# Altium PCB LV2.PcbDoc
Units mm, origin at the board's own origin, x right, y up, seen from the top; angles counter-clockwise.
Board outline 152.4 x 132.97 mm, 2 copper layers (Top Layer, Bottom Layer); 30 components, 23 nets, 91 pads, 8 vias.
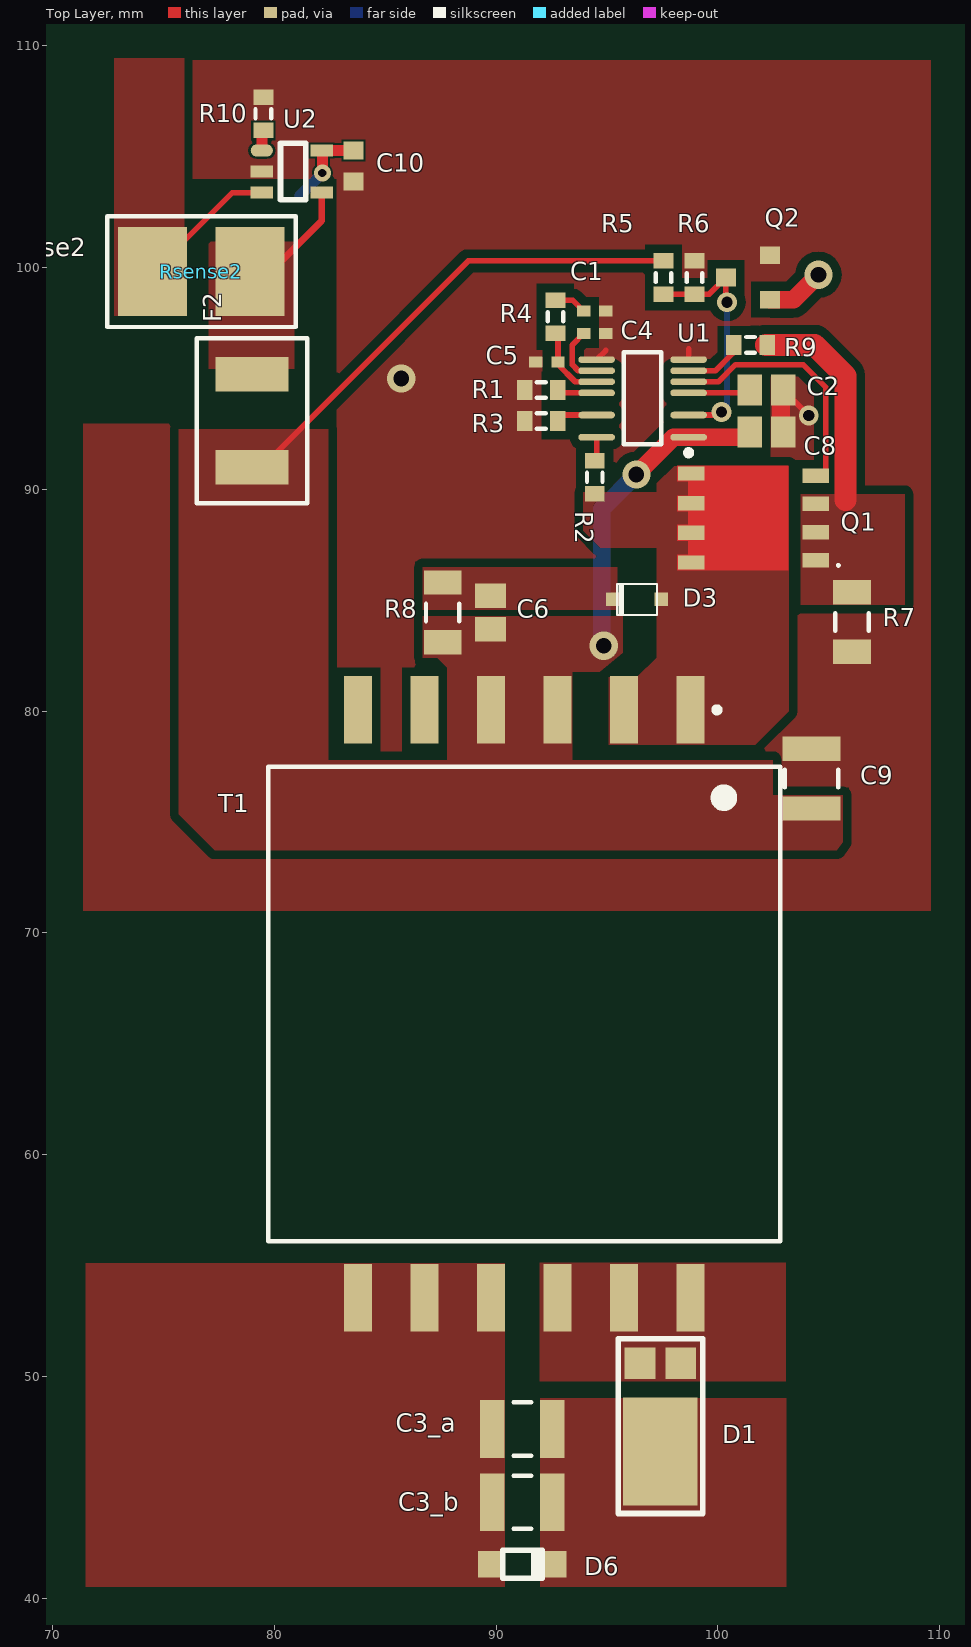
[diagram p0: Top Layer view]
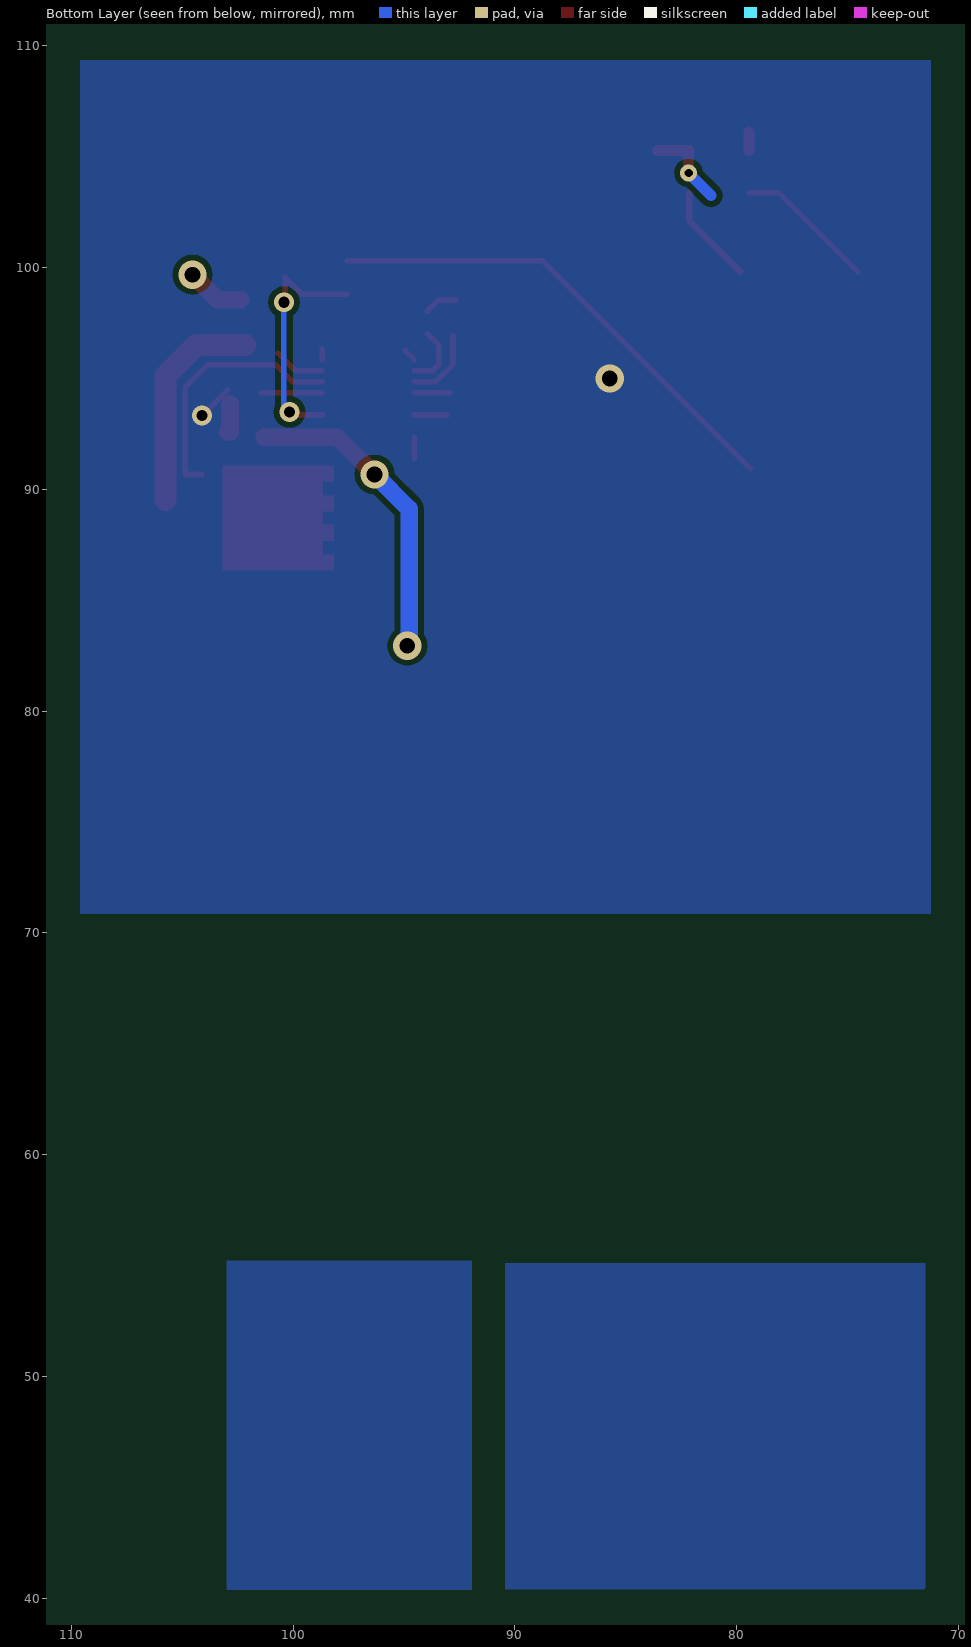
[diagram p1: Bottom Layer view, seen from below]

## Layer stack, top to bottom
Top Solder: solder mask 0.0102, Solder Resist, Dk 3.5
Top Layer: signal copper 0.0356
Dielectric 1: dielectric 0.32, FR-4, Dk 4.8
Bottom Layer: signal copper 0.0356
Bottom Solder: solder mask 0.0102, Solder Resist, Dk 3.5

## Board outline
25.4,25.4 177.8,25.4 177.8,158.369 25.4,158.369

## Design rules (kind name [scope] priority, off if disabled: settings)
Clearance [InNamedPolygon('GNDtop')] p1: gap=0.4
Clearance Clearance_2 [InNamedPolygon('GNDbottom')] p2: gap=0.256
Clearance Clearance_1 [All] p3: gap=0.1
PolygonConnect [All] p1: connectstyle=Direct reliefconductorwidth=0.254 reliefentries=4 polygonreliefangle="90 Angle" airgapwidth=0.254
RoutingVias [All] p1: holewidth=0.711 width=1.27 viastyle="Through Hole" minholewidth=0.711 minwidth=1.27 maxholewidth=0.711 maxwidth=1.27
SolderMaskExpansion [All] p1: expansion=0.102
Width [All] p1: maxlimit=1 minlimit=0.254 preferedwidth=0.254
30 further rules are at their usual default settings.

## Components (designator, comment, footprint, x,y, rotation, side; value= is the part's Value field where it differs from the comment)
C1 "Cap Semi" 0402 94.449,98.038 r180 top
C2 "Cap Semi" C0805 102.196,94.482 r180 top
C3_a "Cap Semi" C1210 91.186,47.625 r0 top
C3_b "Cap Semi" C1210 91.186,44.323 r0 top
C4 "Cap Semi" 0402 94.449,97.022 r180 top
C5 "Cap Semi" 0402 92.29,95.752 r0 top
C6 "Cap Semi" C0805 89.75,84.449 r270 top
C8 "Cap Semi" C0805 102.196,92.577 r180 top
C9 "Cap Semi" C1210 104.228,76.956 r270 top
C10 "Cap Semi" 1608[0603] 83.579,104.585 r90 top
D1 "PDS760-13" PDS1040L 97.409,46.609 r180 top
D3 "BAV20WS" SOD-323 96.353,85.038 r0 top
D6 "BZT52H-B5V6" SOD123F 91.186,41.529 r180 top
F2 "MF-MSMF075-2" MF-MSMF1 78.994,93.091 r270 top
Q1 "BSC320N20NS3 G" INF-PG-TDSON-8-1_V 101.593,88.708 r90 top
Q2 "BSS131" SOT-23_2 101.362,99.552 r0 top
R1 "Res3" J1-0603 92.036,94.482 r0 top
R2 "Res3" J1-0603 94.449,90.545 r270 top
R3 "Res3" J1-0603 92.036,93.085 r180 top
R4 "Res3" J1-0603 92.671,97.784 r270 top
R5 "Res3" J1-0603 97.552,99.552 r90 top
R6 "Res3" J1-0603 98.949,99.552 r270 top
R7 "Res3" C1206 106.053,84.018 r90 top
R8 "Res3" C1206 87.591,84.449 r90 top
R9 "Res3" J1-0603 101.473,96.52 r180 top
R10 "Res3" J1-0603 79.502,106.934 r270 top
Rsense2 "Rsense" R6432 76.708,99.822 r0 top
T1 "750311597" EFD20 91.274,66.796 r270 top
U1 "LT3748IMS#PBF" LT-MS-16-4PR_N 96.608,94.101 r180 top
U2 "INA138" SOT-23 80.785,104.331 r270 top

## Footprints (in the part's own frame and the unit in brackets; to place one, negate y for a bottom-side part, rotate by r counter-clockwise, add the part's x,y. Pads: shape width x height; smd on the part's side, far side on the other; paste and mask are expansions set on the pad)
0402 [mm] "Chip Capacitor, Body 1.0x0.5mm, IPC High Density"
  rect 0.6x0.5 smd: 1(-0.5,0) 2(0.5,0)
  body extent -0.55,-0.3 0.55,0.3, height 1.3
1608[0603] [mm] "Chip Capacitor, Body 1.6x0.8mm, IPC High Density"
  rect 0.8x0.9 smd: 1(-0.7,0) 2(0.7,0)
  body extent -0.87,-0.48 0.87,0.48, height 1.3
C0805 [mm] "Chip Capacitor, Body 2.0x1.3mm, IPC High Density"
  rect 1.1x1.4 smd: 1(-0.75,0) 2(0.75,0)
  body extent -1.1,-0.72 1.1,0.72, height 1.4
C1206 [mm] "Chip Capacitor, Body 3.2x1.6mm, IPC High Density"
  rect 1.1x1.7 smd: 1(-1.35,0) 2(1.35,0)
  silkscreen extent -0.4,-0.75 0.4,0.75, body extent -1.7,-0.9 1.7,0.9, height 1.3
C1210 [mm] "Chip Capacitor, Body 3.2x2.5mm, IPC High Density"
  rect 1.1x2.6 smd: 1(-1.35,0) 2(1.35,0)
  silkscreen extent -0.4,-1.2 0.4,1.2, body extent -1.7,-1.35 1.7,1.35, height 1.3
EFD20 [mm] "SMD, 10-Leads, Body 22.0x20.0mm (max), Pitch 3.75mm, IPC Medium Density"
  rect 3.05x1.27 smd: 1(-13.26,7.5) 2(-13.26,4.5) 3(-13.26,1.5) 4(-13.26,-1.5) 5(-13.26,-4.5) 6(-13.26,-7.5) 7(13.26,-7.5) 8(13.26,-4.5) 9(13.26,-1.5) 10(13.26,1.5) 11(13.26,4.5) 12(13.26,7.5)
  silkscreen extent -13.38,-11.55 10.7,11.55, body extent -14.54,-10 14.54,10, height 11.43
INF-PG-TDSON-8-1_V [mm] "TDSON, 8-Leads, Body 6.15x5.15mm, Pitch 1.27mm"
  rect 0.65x1.2 smd: 1(-1.905,-2.825) 2(-0.635,-2.825) 3(0.635,-2.825) 4(1.905,-2.825) 5(2.007,2.794) 6(0.66,2.794) 7(-0.66,2.794) 8(-2.007,2.794)
  Top Layer region: -2.35,2.925 -2.35,-1.575 2.35,-1.575 2.35,2.925
  Top Layer region: -2.35,2.925 -1.65,2.925 -1.65,3.425 -2.35,3.425
  Top Layer region: 1.65,2.925 2.35,2.925 2.35,3.425 1.65,3.425
  Top Layer region: -1.015,2.925 -0.315,2.925 -0.315,3.425 -1.015,3.425
  Top Layer region: 0.315,2.925 1.015,2.925 1.015,3.425 0.315,3.425
  silkscreen extent -2.23,-3.94 -2.03,-3.74, body extent -2.58,-3.08 2.58,3.08, height 1
J1-0603 [mm] "Chip Resistor, Body 1.6x0.8mm, IPC High Density"
  rect 0.7x0.9 smd: 1(-0.75,0) 2(0.75,0)
  silkscreen extent -0.2,-0.35 0.2,0.35, body extent -0.85,-0.48 0.85,0.48, height 0.9
LT-MS-16-4PR_N [mm] "SOP, 12-Leads, Body 4.1x3.1mm, Pitch 0.5mm, IPC Medium Density"
  oval 1.65x0.3 smd: 1(-2.075,1.75) 3(-2.075,0.75) 5(-2.075,-0.25) 6(-2.075,-0.75) 7(-2.075,-1.25) 8(-2.075,-1.75) 9(2.075,-1.75) 10(2.075,-1.25) 11(2.075,-0.75) 12(2.075,-0.25) 14(2.075,0.75) 16(2.075,1.75)
  silkscreen extent -2.2,-2.08 0.85,2.57, body extent -1.55,-2.05 1.55,2.05, height 1.1
MF-MSMF1 [mm]
  rect 1.55x3.3 smd: 1(-2.1,0) 2(2.1,0)
  silkscreen extent -3.73,-2.5 3.73,2.5
PDS1040L [mm]
  rect 1.39x1.4 smd: 1(-0.92,-3.982) 1(0.92,-3.982)
  rect 3.36x4.86 smd: 2(0,0)
  silkscreen extent -1.91,-5.08 1.91,2.79, body extent -1.52,-4.06 1.52,2.29, height 1
R6432 [mm]
  rect 3.1x4 smd: 1(-2.2,0) 2(2.2,0)
  silkscreen extent -4.25,-2.5 4.25,2.5
SOD123F [mm]
  rect 1.2x1.2 smd: 1(-1.4,0) 2(1.4,0)
  silkscreen extent -1.02,-0.64 0.89,0.64
SOD-323 [mm]
  rect 0.6x0.6 smd: 1(-1.1,0) 2(1.1,0)
  silkscreen extent -0.9,-0.7 0.9,0.7
SOT-23 [mm]
  oval 0.55x1 smd: 1(-0.95,-1.35)
  rect 0.55x1 smd: 2(0,-1.35) 3(0.95,-1.35) 4(0.95,1.35) 5(-0.95,1.35)
  silkscreen extent -1.27,-0.51 1.27,0.63
SOT-23_2 [mm]
  rect 0.9x0.8 smd: 1(1,-1) 2(1,1) 3(-1,0)
  body extent -0.89,-1.02 1.02,1.14, height 0.5

## Part data
C1 C2 C3_a C3_b C4 C5 C6 C8 C9 C10: "Capacitor (Semiconductor SIM Model)"
D1: library part PDS1040L, "Schottky Diode"
D3: "Power Diode"
D6: "Zener Diode"
F2: library part "Fuse 1", "Fuse"
Q1: "N-Channel OptiMOS 3 Power-Transistor, 200 V VDS, 36 A ID, -55 to 150 degC, PG-TDSON-8-1, Reel, Green"
Q2: "N-Channel MOSFET"
R1 R2 R3 R4 R5 R6 R7 R8 R9 R10: "Resistor"
Rsense2: "CRF2512-FV-R001ELF"
T1: "Flyback Transformer suitable or LT3573/ LT3574/ LT3575/ LT3748 WE-FB, Ui=20-48V"
U1: "Isolated Flyback Controller, 16-pin SOP (MS-16), -40 to 125 degC, Pb-Free"

## Via types
v1: diameter 1.27, hole 0.711, Top Layer to Bottom Layer, 4 vias
v2: diameter 0.9, hole 0.5, Top Layer to Bottom Layer, 3 vias
v3: diameter 0.762, hole 0.381, Top Layer to Bottom Layer, 1 vias

## Nets (pads, with @x,y where several pads share a name; then routed paths per layer and width w, separated by ;. In a path a pad name is that pad's centre, name@x,y a point inside that pad or via, vN(x,y) a via of type N, cw(c..) or ccw(c..) an arc to the next point about the centre after c; other vN are vias at no path point)
48V: Rsense2.1 U2.3 | length 6.4
  Top Layer w0.254: Rsense2.1@74.549,99.822 78.108,103.381 U2.3
+5V: C10.2 U2.5 | length 3.9
  Top Layer w0.5: U2.5 C10.2@83.575,105.281 ; v3(82.169,104.267) U2.5@82.169,105.247
  Bottom Layer w0.508: 81.153,103.251 v3(82.169,104.267)
GND: C1.1 C2.1 C4.1 C5.1 C8.1 C9.1 C10.1 Q2.2 R1.1 R3.2 R6.1 R7.1 R10.1 U1.8 U1.9 U2.2 | length 4.1
  Top Layer w0.254: U1.9 94.949,96.267 ; U1.8 98.683,96.328 ; C2.1@102.958,94.482 v2(104.101,93.339)
  Top Layer w0.8: C2.1@102.851,93.857 102.851,92.577 C8.1
  other v1: 85.725,94.996
NetC1_2: C1.2 R4.1 | length 1.5
  Top Layer w0.254: R4.1 93.453,98.534 C1.2
NetC2_2: C2.2 U1.5 | length 2.8
  Top Layer w0.254: U1.5 C2.2@101.446,94.351
NetC3_a_1: C3_a.1 C3_b.1 D6.2 T1.7 T1.8 T1.9
NetC3_a_2: C3_a.2 C3_b.2 D1.2 D6.1
NetC4_2: C4.2 U1.10 | length 2.8
  Top Layer w0.254: C4.2 93.433,96.506 93.433,95.625 93.707,95.351 U1.10
NetC5_2: C5.2 R4.2 U1.11 | length 3.2
  Top Layer w0.254: C5.2@92.79,95.633 93.572,94.851 U1.11 ; C5.2 R4.2@92.79,96.915
NetC6_1: C6.1 D3.1 R8.2
NetC6_2: C6.2 C8.2 C9.2 F2.2 R5.2 R8.1 T1.3 T1.4 U1.1 | length 36
  Top Layer w0.254: F2.2@79.375,90.932 88.745,100.302 R5.2
  Top Layer w0.8: v1(96.326,90.672) 98.005,92.351 U1.1 C8.2@101.307,92.351
  Bottom Layer w0.8: v1@94.763,83.038 94.763,89.109 v1(96.326,90.672)
  other v1: 94.853,82.948
NetD1_1: D1.1 T1.10 T1.11 T1.12
NetD3_2: D3.2 Q1.5 Q1.6 Q1.7 Q1.8 R2.2 T1.1 T1.2
NetF2_1: F2.1 Rsense2.2 U2.4 | length 4.5
  Top Layer w0.3: Rsense2.2@79.849,99.822 82.135,102.108 U2.4
NetQ1_1: Q1.1 Q1.2 Q1.3 R7.2 R9.1 | length 9.7
  Top Layer w1: R9.1@102.184,96.514 104.355,96.514 105.752,95.117 105.752,89.529
NetQ1_4: Q1.4 U1.6 | length 11.6
  Top Layer w0.254: U1.6 100.025,94.851 100.799,95.625 103.847,95.625 104.863,94.609 104.863,90.672 Q1.4@104.134,90.672
NetQ2_1: Q2.1 | length 2.6
  Top Layer w0.8: Q2.1 103.41,98.552 v1(104.537,99.679)
NetQ2_3: Q2.3 R5.1 R6.2 U1.3 | length 11.1
  Top Layer w0.254: R5.1 R6.2 99.612,98.802 Q2.3 v2@100.362,98.492 ; U1.3 100.026,93.351 v2(100.161,93.486) 100.316,93.486 v2@100.457,93.345
  Bottom Layer w0.254: v2(100.161,93.486) 100.415,93.74 v2(100.415,98.439)
NetR1_2: R1.2 U1.12 | length 1.6
  Top Layer w0.254: R1.2@92.917,94.351 U1.12
NetR2_1: R2.1 U1.16 | length 1
  Top Layer w0.254: R2.1@94.533,91.379 U1.16
NetR3_1: R3.1 U1.14 | length 1.5
  Top Layer w0.254: R3.1@93.052,93.351 U1.14
NetR9_2: R9.2 U1.7 | length 2.3
  Top Layer w0.254: U1.7 99.89,95.351 R9.2@100.684,96.145
NetR10_2: R10.2 U2.1 | length 0.8
  Top Layer w0.5: U2.1 R10.2@79.435,106.117
pads on no net: T1.5 T1.6

## Polygon pours and split planes (outlines as drawn)
GND on Top Layer "Component Side-No Net" (solid, pour order 125): 109.601,102.235 109.601,109.347 76.327,109.347 76.327,104.013 82.804,104.013 82.804,102.235
NetC3_a_2 on Top Layer "Component Side-No Net" (solid, pour order 122): 91.986,49.022 91.986,41.529 91.986,40.513 103.086,40.513 103.086,49.022
48V on Top Layer "Component Side-No Net" (solid, pour order 119): 75.946,97.822 72.771,97.822 72.771,109.442 75.946,109.442
NetF2_1 on Top Layer "NETF2_LV4_1_L01_P581" (solid, pour order 116): 80.899,95.441 77.032,95.441 77.032,101.155 80.899,101.155
GND on Top Layer "GNDtop" (solid, pour order 126): 82.804,102.616 82.804,92.964 71.374,92.964 71.374,70.987 109.601,70.987 109.601,102.616
NetC6_2 on Top Layer "Component Side-No Net" (solid, pour order 123): 82.423,92.71 82.423,77.793 102.486,77.793 102.486,76.198 105.633,76.198 105.633,74.075 105.373,73.728 77.313,73.728 75.689,75.352 75.689,92.71
NetC3_a_1 on Top Layer "Component Side-No Net" (solid, pour order 124): 90.396,55.093 90.396,51.918 90.395,40.513 71.501,40.513 71.501,55.093
NetD1_1 on Top Layer "Component Side-No Net" (solid, pour order 120): 91.962,55.123 91.962,51.948 91.962,49.784 103.063,49.784 103.063,55.123
NetC6_2 on Top Layer "Component Side-No Net" (solid, pour order 118): 86.702,83.687 86.702,82.417 87.337,82.417 87.793,81.961 87.793,76.956 93.433,76.956 93.433,81.782 94.676,81.782 95.719,82.629 95.719,84.268 86.702,84.268
NetD3_2 on Top Layer "Component Side-No Net" (solid, pour order 114): 93.941,89.868 93.941,88.132 94.703,87.37 97.243,87.37 97.243,89.868
NetQ1_1 on Top Layer "Component Side-No Net" (solid, pour order 117): 103.743,89.783 108.419,89.783 108.419,84.798 103.743,84.798
NetD3_2 on Top Layer "Component Side-No Net" (solid, pour order 121): 95.084,78.48 95.084,81.528 96.354,81.528 97.243,82.417 97.243,85.592 97.243,90.268 98.028,91.053 103.203,91.053 103.203,79.995 101.688,78.48
NetC6_1 on Top Layer "Component Side-No Net" (solid, pour order 115): 95.465,84.576 86.702,84.576 86.702,86.481 95.465,86.481
GND on Bottom Layer "GNDbottom" (solid, pour order 129): 109.601,109.347 109.601,70.86 71.247,70.86 71.247,109.347
no net on Bottom Layer "Component Side-No Net" (solid, pour order 128): 90.424,40.4 90.424,55.108 71.501,55.108 71.501,40.375
no net on Bottom Layer "Component Side-No Net" (solid, pour order 127): 91.948,40.386 91.948,55.208 102.997,55.208 102.997,40.386